# EAGLE board plugV11 (EAGLE 7.5.0)
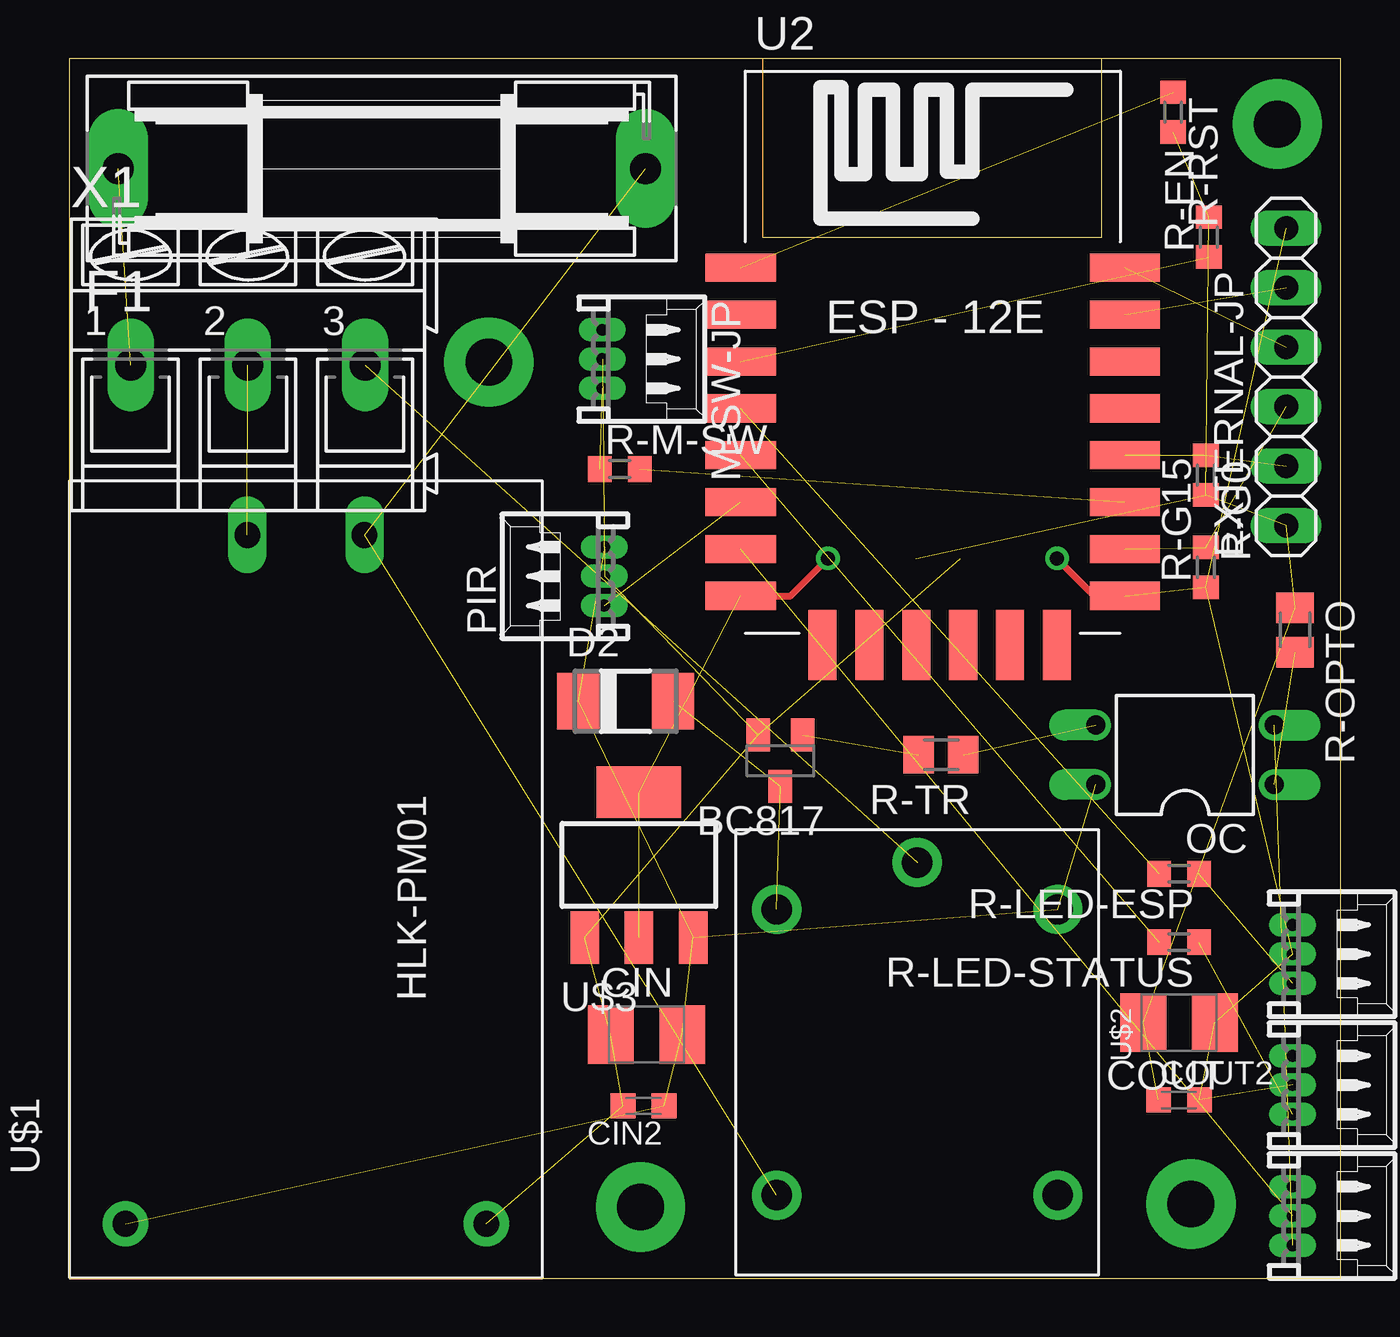
[diagram p0: board, top side]
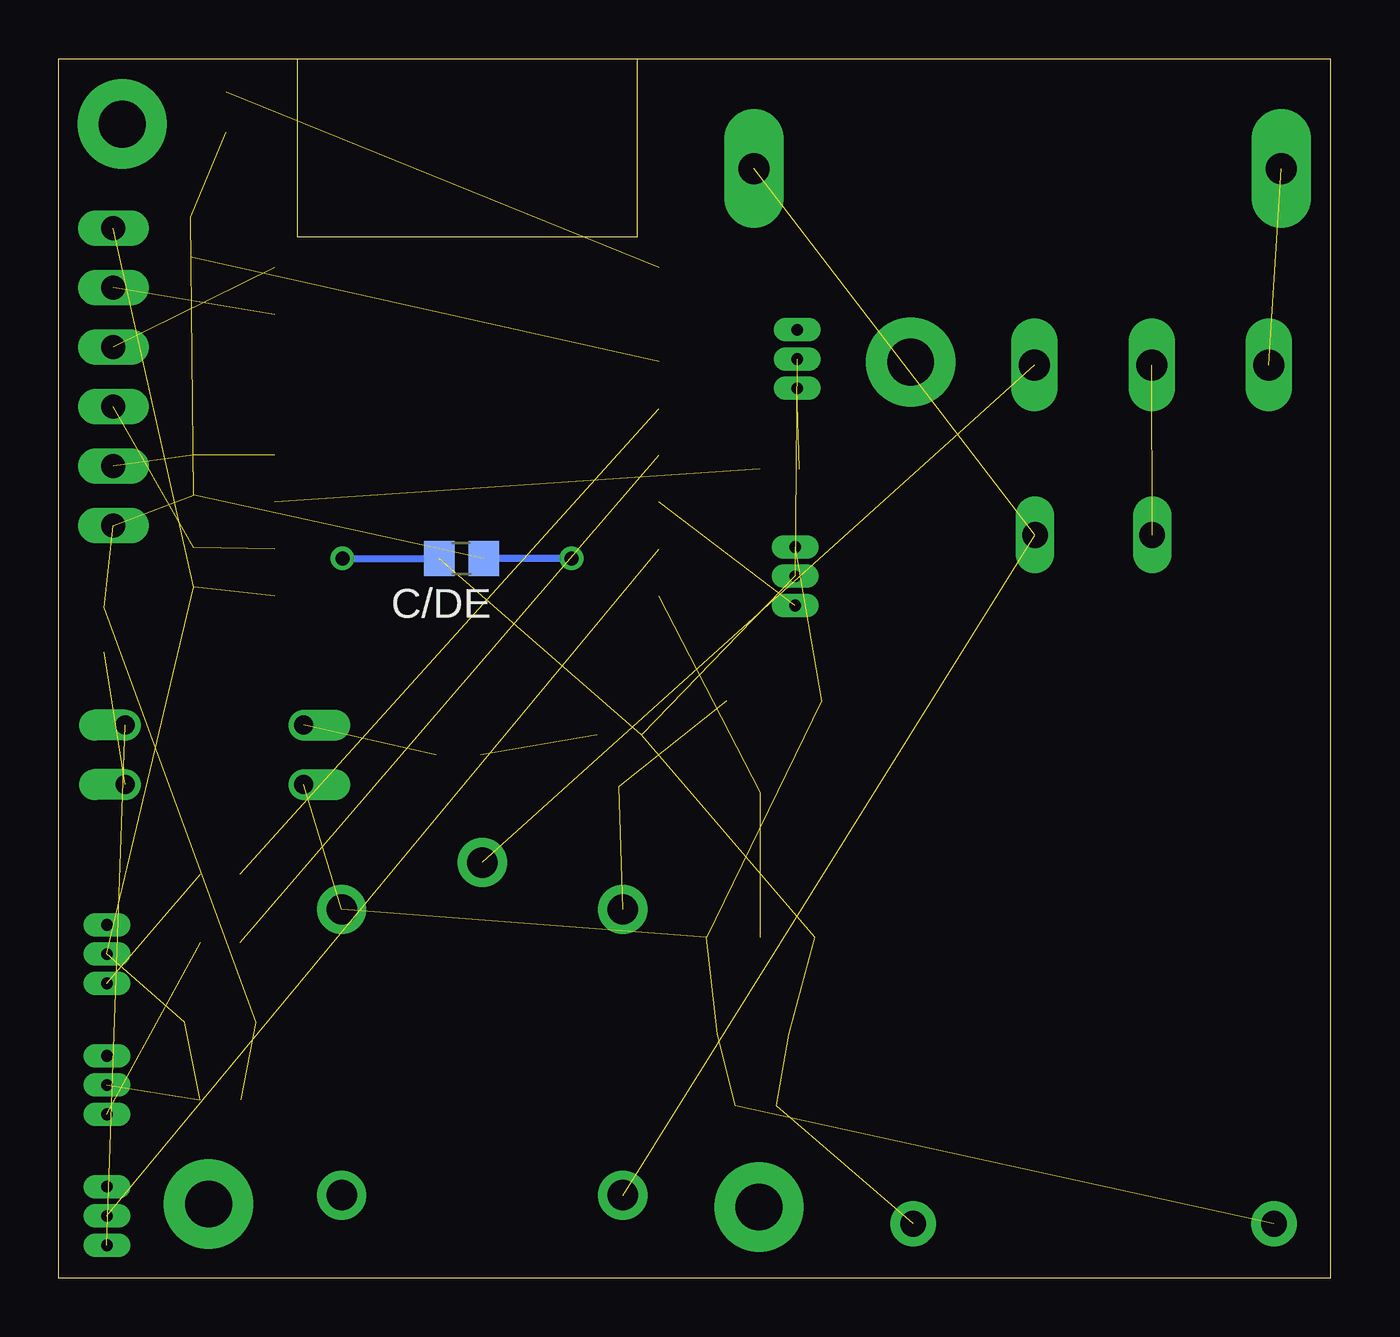
[diagram p1: board, bottom side, seen from below]

Size 54.28 x 52.07 mm. Coordinates in mm from the lower left corner, seen from the top.
Outline: 0,0 54.28,0 54.28,52.06 0,52.06 0,0
Outline: 29.59,52.07 29.59,44.45 44.07,44.45 44.07,52.07 29.59,52.07
Copper layers (1*16): Top 0.035mm / dielectric 1.5mm / Bottom 0.035mm
Design rules "default": minimum track width 10mil, minimum drill 24mil, track to track 8mil, track to pad 8mil, pad to pad 8mil, via to via 8mil, smd to smd 8mil, copper to edge 40mil, drill to drill 8mil, minimum pad ring 10mil, minimum via ring 8mil, stop-mask expansion 4mil, vias tented up to drill 0mil, thermal gap 10mil

## Footprints (pad centres in the part's own frame; a part is rotated, then mirrored left to right if it is on the bottom)
SOT23-BEC = smd 1 x 1.4: B -0.95,-1.1; C 0,1.1; E 0.95,-1.1
C0805 = smd 1.3 x 1.5: 1 -0.95,0; 2 0.95,0
B/3528-21R = smd 1.95 x 2.5: + 1.525,0; - -1.525,0
C0603K = smd 1.05 x 1.08: 1 -0.875,0; 2 0.875,0
DO-214AC = smd 1.8 x 2.4: A 2.025,0; C -2.025,0
1X06 = drill 1.016 long: 1 -6.35,0; 2 -3.81,0; 3 -1.27,0; 4 1.27,0; 5 3.81,0; 6 6.35,0
SH22,5 = drill 1.321 pad 2.54 long: 1 -11.252,0; 2 11.252,0
53048-03 = drill 0.5 pad 0.698 long: 1 1.25,-1.25; 2 0,-1.25; 3 -1.25,-1.25
DIL04 = drill 0.813 offset: 1 -1.27,-3.81; 2 1.27,-3.81; 3 1.27,3.81; 4 -1.27,3.81
R0603 = smd 1 x 1.1: 1 -0.85,0; 2 0.85,0
M0805 = smd 1.3 x 1.6: 1 -0.95,0; 2 0.95,0
ESP12E-SMD = smd 3 x 1.2: ADC -8.3,3.8; CH_PD -8.3,1.8; GND 8.1,-8.2; GPIO0 8.1,-2.2; GPIO2 8.1,-4.2; GPIO4 8.1,-0.2; GPIO5 8.1,1.8; GPIO12 -8.3,-4.2; GPIO13 -8.3,-6.2; GPIO14 -8.3,-2.2; GPIO15 8.1,-6.2; GPIO16 -8.3,-0.2; RESET -8.3,5.8; RXD0 8.1,3.8; TXD0 8.1,5.8; VCC -8.3,-8.2 | smd 1.2 x 3: CS0 -4.8,-10.3; GPIO9 -0.8,-10.3; GPIO10 1.2,-10.3; MISO -2.8,-10.3; MOSI 3.2,-10.3; SCLK 5.2,-10.3
HLK-PM01 = drill 1.1 pad 1.93: +5V 15.19,-7.76; GND 15.19,7.64 | drill 1.1 long: AC1 -14.21,2.44; AC2 -14.21,-2.56
RELAY-SONGLE = drill 1.3 pad 2.1: COM -8.1,0; NC 6.1,6; NO 6.1,-6; V+ -6.1,6; V- -6.1,-6
SOT-223 = smd 1.219 x 2.235: 1 -2.381,-3.099; 2 -0.07,-3.099; 3 2.241,-3.099 | smd 3.6 x 2.2: 4 -0.07,3.099
AK300/3 = drill 1.321 long: 1 -5.004,0; 2 0,0; 3 5.004,0

## Placement (x,y rotation side)
BC817  [SOT23-BEC]  30.35,22.1 180 top
C/DE  0.1uF  [C0805]  37.08,30.73 180 bottom
CIN  22uF/Tan  [B/3528-21R]  24.64,10.41 0 top
CIN2  0.1uF/ce  [C0603K]  24.51,7.37 180 top
COUT  22uF/Tan  [B/3528-21R]  47.37,10.92 180 top
COUT2  0.1uF/ce  [C0603K]  47.37,7.62 0 top
D2  [DO-214AC]  23.75,24.64 0 top
EXTERNAL-JP  Programming  [1X06]  51.94,38.48 90 top
F1  FUSESH22,5  [SH22,5]  13.34,47.37 0 top
LED-ESP-JP  53048-03  [53048-03]  53.47,13.84 270 top
LED-RELAY-JP  53048-03  [53048-03]  53.47,2.67 270 top
LED-STATUS-JP  53048-03  [53048-03]  53.47,8.26 270 top
M-SW-JP  53048-03  [53048-03]  24,39.24 270 top
OC  PC817  [DIL04]  47.62,22.35 90 top
PIR  53048-03  [53048-03]  21.59,29.97 90 top
R-EN  10k  [R0603]  48.64,44.45 90 top
R-G0  10k  [R0603]  48.51,34.29 270 top
R-G15  1k  [R0603]  48.51,30.35 90 top
R-LED-ESP  470  [R0603]  47.37,17.27 180 top
R-LED-STATUS  470  [R0603]  47.37,14.35 180 top
R-M-SW  470  [R0603]  23.5,34.54 0 top
R-OPTO  470  [M0805]  52.32,27.69 270 top
R-RST  10k  [R0603]  47.12,49.78 270 top
R-TR  470  [M0805]  37.21,22.35 180 top
U2  [ESP12E-SMD]  36.96,37.34 0 top
U$1  HLK-PM01  [HLK-PM01]  10.16,17.53 270 top
U$2  RELAY-SONGLE  [RELAY-SONGLE]  36.2,9.65 270 top
U$3  AMS1117-3.3  [SOT-223]  24.38,17.65 0 top
X1  [AK300/3]  7.62,38.99 0 top

## Library data of the parts
BC817 = transistor-neu-to92
C/DE CIN CIN2 COUT COUT2 R-EN R-G0 R-G15 R-LED-ESP R-LED-STATUS R-M-SW R-OPTO R-RST R-TR = rcl
D2 = diode
EXTERNAL-JP = pinhead
F1 = fuse; OC_FARNELL: unknown; OC_NEWARK: unknown
LED-ESP-JP LED-RELAY-JP LED-STATUS-JP M-SW-JP PIR = con-molex; MF: WALDOM/MOLEX; MPN: 53048-0310; OC_FARNELL: 9732918; OC_NEWARK: 38C9908
OC = optocoupler; MPN: PC817X4J000F; OC_FARNELL: 9707727; OC_NEWARK: 97K7059
U2 = esp8266modules
U$1 = HLK-PM01
U$2 = Seeed-OPL-Relay
U$3 = AMS1117-3.3
X1 = con-ptr500; OC_FARNELL: unknown; OC_NEWARK: unknown

## Nets
3V3: C/DE.1 COUT2.1 COUT.+ EXTERNAL-JP.1 R-EN.2 R-G0.2 R-OPTO.1 R-RST.2 U2.VCC U$3.2 U$3.4
+5V: CIN2.1 CIN.+ D2.C OC.4 PIR.1 U$1.+5V U$2.V+ U$3.3
COM: U$2.COM X1.3
EN: R-EN.1 U2.CH_PD
G-00: EXTERNAL-JP.2 R-G0.1 U2.GPIO0
G-12: PIR.3 U2.GPIO12
G-13: LED-RELAY-JP.2 U2.GPIO13
G-15: EXTERNAL-JP.3 R-G15.2 U2.GPIO15
GND: BC817.E C/DE.2 CIN2.2 CIN.- COUT2.2 COUT.- EXTERNAL-JP.6 LED-ESP-JP.2 LED-STATUS-JP.2 M-SW-JP.2 PIR.2 R-G15.1 U2.GND U$1.GND U$3.1
LED-ESP+: LED-ESP-JP.1 R-LED-ESP.1
LED-RELAY+: LED-RELAY-JP.1 OC.2
LED-STATUS+: LED-STATUS-JP.1 R-LED-STATUS.1
LINE: F1.1 X1.1
M-SW+: M-SW-JP.1 R-M-SW.1
N: U$1.AC2 X1.2
N$1: OC.3 R-TR.1
N$2: BC817.B R-TR.2
N$4: R-LED-ESP.2 U2.GPIO16
N$7: R-M-SW.2 U2.GPIO2
N$8: R-LED-STATUS.2 U2.GPIO14
N$13: OC.1 R-OPTO.2
N$18: BC817.C D2.A U$2.V-
RELAY-NO: F1.2 U$1.AC1 U$2.NO
RST: R-RST.1 U2.RESET
RX: EXTERNAL-JP.5 U2.RXD0
TX: EXTERNAL-JP.4 U2.TXD0

## Tracks (layer width: path | path; a pad name or v marks a point on that pad's centre or on a via)
3V3  (via drill 0.6)  (9 unrouted)
  Top 0.305: U2.VCC 30.79,29.14 v32.38,30.73
  Bottom 0.305: v32.38,30.73 C/DE.1
+5V  (7 unrouted)
COM  (1 unrouted)
EN  (1 unrouted)
G-00  (2 unrouted)
G-12  (1 unrouted)
G-13  (1 unrouted)
G-15  (2 unrouted)
GND  (via drill 0.6)  (13 unrouted)
  Top 0.305: U2.GND 43.76,29.14 v42.16,30.73
  Bottom 0.305: v42.16,30.73 C/DE.2
LED-ESP+  (1 unrouted)
LED-RELAY+  (1 unrouted)
LED-STATUS+  (1 unrouted)
LINE  (1 unrouted)
M-SW+  (1 unrouted)
N  (1 unrouted)
N$1  (1 unrouted)
N$2  (1 unrouted)
N$3  (via drill 2 pad 3.81)
  other vias: 17.91,39.12
N$4  (1 unrouted)
N$5  (via drill 2 pad 3.81)
  other vias: 24.38,3.05
N$6  (via drill 2 pad 3.81)
  other vias: 47.88,3.17
N$7  (1 unrouted)
N$8  (1 unrouted)
N$9  (via drill 2 pad 3.81)
  other vias: 51.56,49.28
N$13  (1 unrouted)
N$18  (2 unrouted)
RELAY-NO  (2 unrouted)
RST  (1 unrouted)
RX  (1 unrouted)
TX  (1 unrouted)